# Altium PCB Diag-Board.PcbDoc
Units mm, origin at the board's own origin, x right, y up, seen from the top; angles counter-clockwise.
Board outline 152.4 x 101.6 mm, 2 copper layers (Top Layer, Bottom Layer); 19 components, 130 nets, 420 pads, 0 vias.
Unrouted connection lines stored in the file: 106.
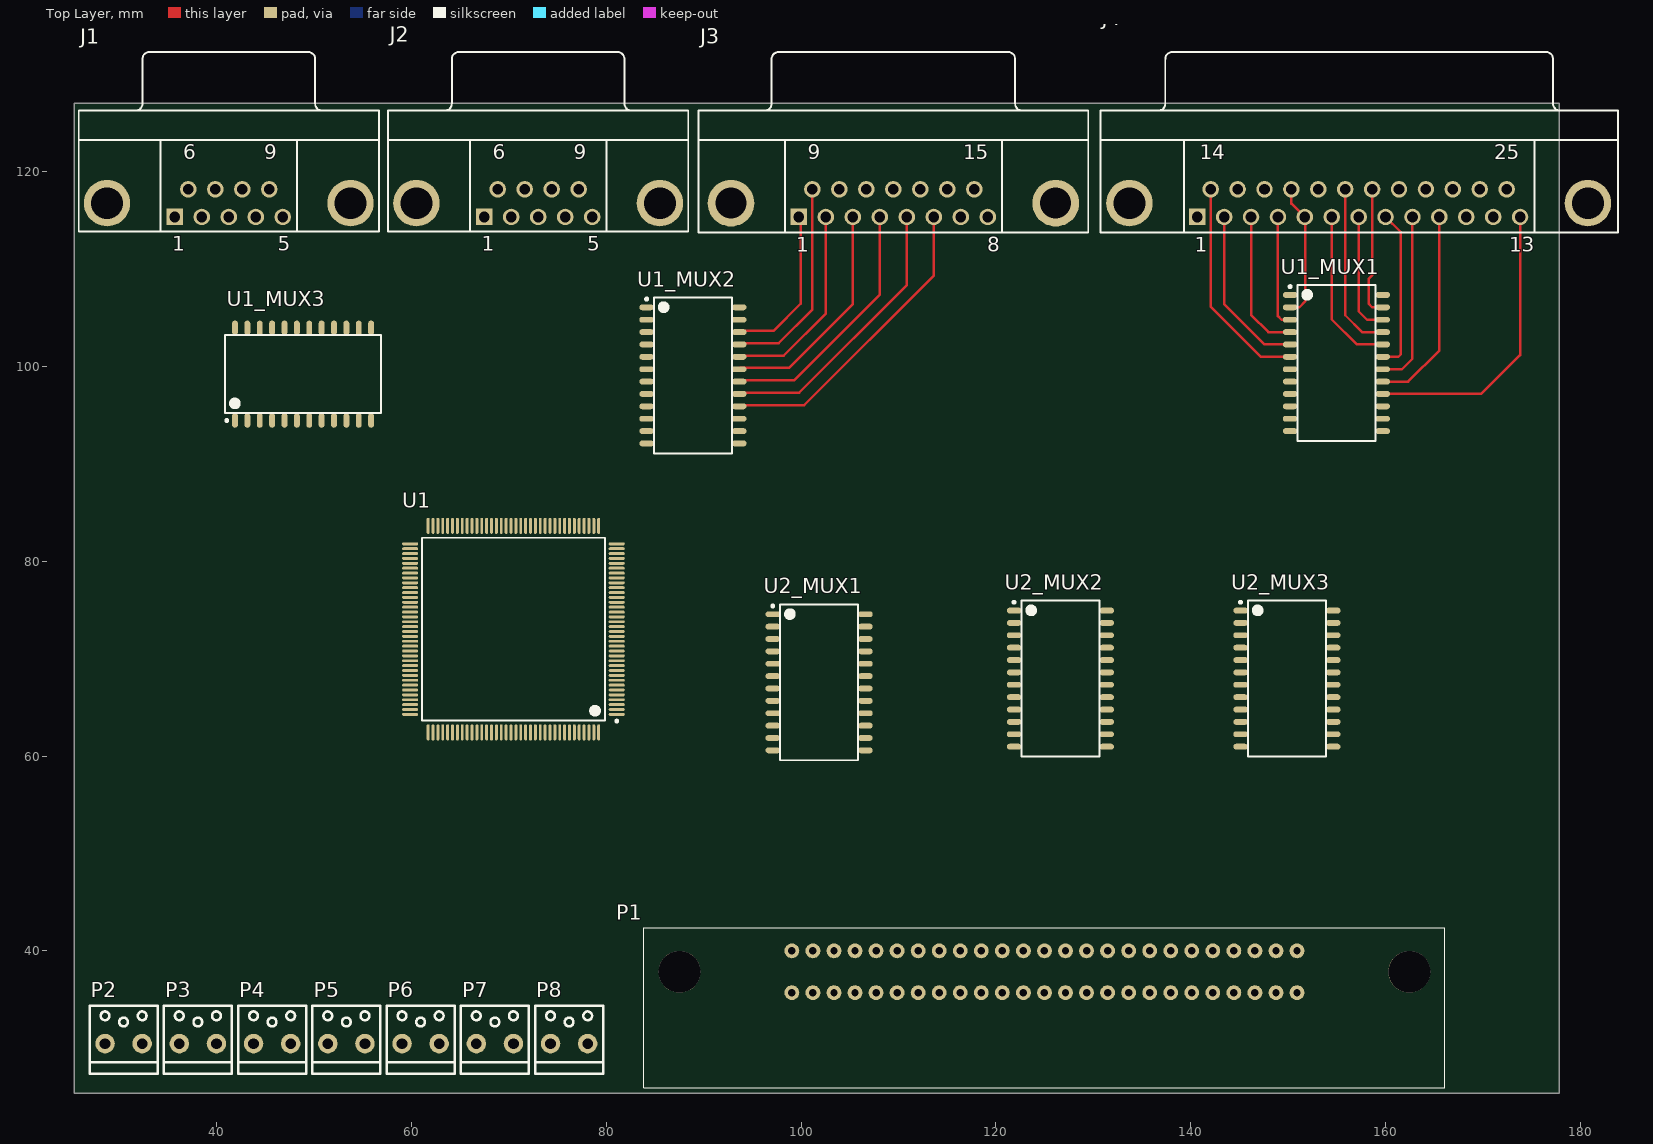
[diagram p0: Top Layer view]
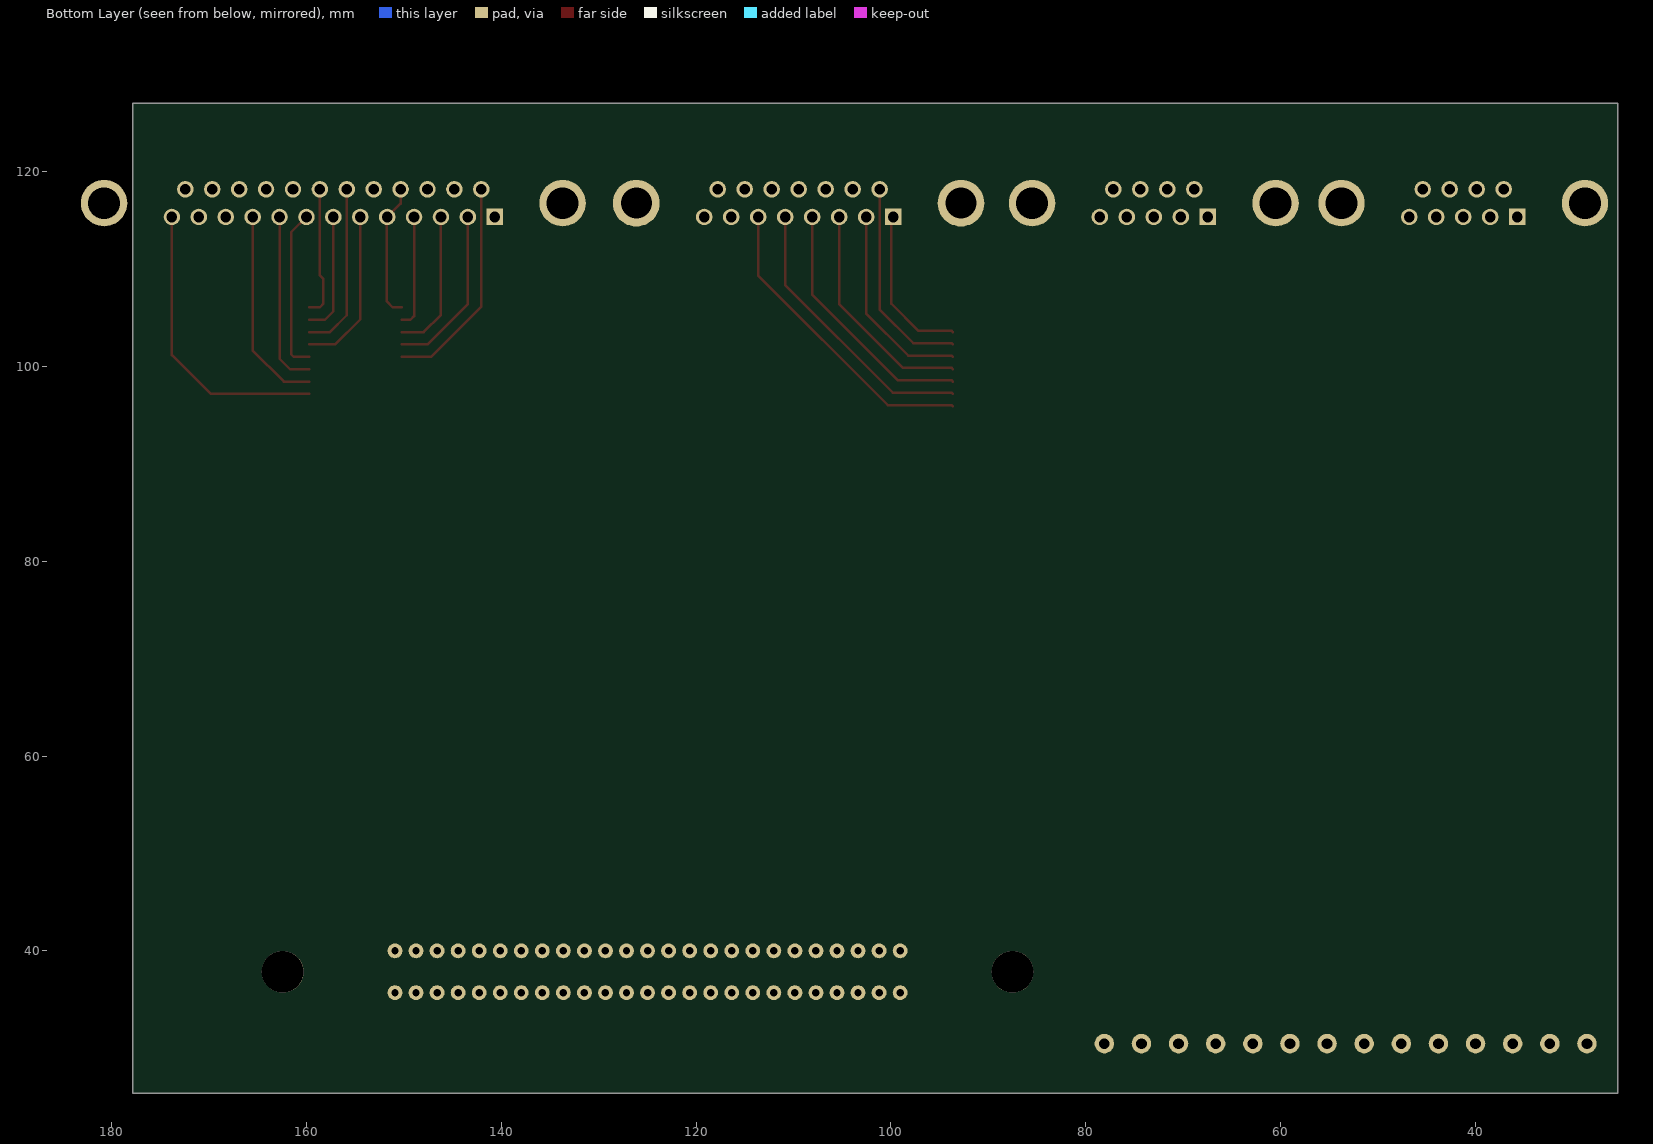
[diagram p1: Bottom Layer view, seen from below]

## Layer stack, top to bottom
Top Solder: solder mask 0.0102, Solder Resist, Dk 3.5
Top Layer: signal copper 0.0356
Dielectric 1: dielectric 0.32, FR-4, Dk 4.8
Bottom Layer: signal copper 0.0356
Bottom Solder: solder mask 0.0102, Solder Resist, Dk 3.5

## Board outline
25.4,25.4 177.8,25.4 177.8,127 25.4,127

## Design rules (kind name [scope] priority, off if disabled: settings)
Clearance [All] p1: gap=0.254
PolygonConnect [All] p1: connectstyle=Relief reliefconductorwidth=0.254 reliefentries=4 polygonreliefangle="90 Angle" airgapwidth=0.254
RoomDefinition MUX3 [InComponentClass('MUX3')] p1: confinementstyle=ConfineIn formatcopy=TRUE lockcomponents=FALSE outline 0,0 50.8,0 50.8,25.4 0,25.4
RoomDefinition MUX2 [InComponentClass('MUX2')] p2: confinementstyle=ConfineIn formatcopy=TRUE lockcomponents=FALSE outline 0,0 50.8,0 50.8,25.4 0,25.4
RoomDefinition MUX1 [InComponentClass('MUX1')] p3: confinementstyle=ConfineIn formatcopy=TRUE lockcomponents=FALSE outline 0,0 50.8,0 50.8,25.4 0,25.4
RoomDefinition MCU [InComponentClass('MCU')] p4: confinementstyle=ConfineIn formatcopy=TRUE lockcomponents=FALSE outline 0,0 50.8,0 50.8,25.4 0,25.4
RoomDefinition Connectors [InComponentClass('Connectors')] p5: confinementstyle=ConfineIn formatcopy=TRUE lockcomponents=FALSE outline 0,0 50.8,0 50.8,25.4 0,25.4
RoutingVias [All] p1: holewidth=0.711 width=1.27 viastyle="Through Hole" minholewidth=0.711 minwidth=1.27 maxholewidth=0.711 maxwidth=1.27
SolderMaskExpansion [All] p1: expansion=0.102
Width [All] p1: maxlimit=0.254 minlimit=0.254 preferedwidth=0.254
30 further rules are at their usual default settings.

## Classes and differential pairs
net class ADDR_MUX[0..23]: ADDR_MUX0 ADDR_MUX1 ADDR_MUX2 ADDR_MUX3 ADDR_MUX4 ADDR_MUX5 ADDR_MUX6 ADDR_MUX7 ADDR_MUX8 ADDR_MUX9 ADDR_MUX10 ADDR_MUX11 ADDR_MUX12 ADDR_MUX13 ADDR_MUX14 ADDR_MUX15 ADDR_MUX16 ADDR_MUX17 ADDR_MUX18 ADDR_MUX19 ADDR_MUX20 ADDR_MUX21 ADDR_MUX22 ADDR_MUX23
channel class MUX_CHANNEL: MUX1 MUX2 MUX3
net class SENS[1..50]: SENS1 SENS2 SENS3 SENS4 SENS5 SENS6 SENS7 SENS8 SENS9 SENS10 SENS11 SENS12 SENS13 SENS14 SENS15 SENS16 SENS17 SENS18 SENS19 SENS20 SENS21 SENS22 SENS23 SENS24 SENS25 SENS26 SENS27 SENS28 SENS29 SENS30 SENS31 SENS32 SENS33 SENS34 SENS35 SENS36 SENS37 SENS38 SENS39 SENS40 SENS41 SENS42 SENS43 SENS44 SENS45 SENS46 SENS47 SENS48 SENS49 SENS50
net class CHECK[1..50]: CHECK1 CHECK2 CHECK3 CHECK4 CHECK5 CHECK6 CHECK7 CHECK8 CHECK9 CHECK10 CHECK11 CHECK12 CHECK13 CHECK14 CHECK15 CHECK16 CHECK17 CHECK18 CHECK19 CHECK20 CHECK21 CHECK22 CHECK23 CHECK24 CHECK25 CHECK26 CHECK27 CHECK28 CHECK29 CHECK30 CHECK31 CHECK32 CHECK33 CHECK34 CHECK35 CHECK36 CHECK37 CHECK38 CHECK39 CHECK40 CHECK41 CHECK42 CHECK43 CHECK44 CHECK45 CHECK46 CHECK47 CHECK48
component class MUX3: U1_MUX3 U2_MUX3
component class MUX2: U1_MUX2 U2_MUX2
component class MUX1: U1_MUX1 U2_MUX1
component class MCU: U1
component class Connectors: J1 J2 J3 J4 P1 P2 P3 P4 P5 P6 P7 P8

## Components (designator, comment, footprint, x,y, rotation, side; value= is the part's Value field where it differs from the comment)
J1 "D Connector 9" DSUB1.385-2H9F 41.275,126.238 r0 top
J2 "D Connector 9" DSUB1.385-2H9M 73.025,126.238 r0 top
J3 "D Connector 15" DSUB1.385-2H15M 109.474,126.238 r0 top
J4 "D Connector 25" DSUB1.385-2H25A-F 157.226,126.238 r0 top
P1 "CENR-50M" CENR-50M 99.06,40.005 r0 top
P2 "DG340-3.81" DG340-3.81-02P-00A(H) 28.575,30.48 r0 top
P3 "DG340-3.81" DG340-3.81-02P-00A(H) 36.195,30.48 r0 top
P4 "DG340-3.81" DG340-3.81-02P-00A(H) 43.815,30.48 r0 top
P5 "DG340-3.81" DG340-3.81-02P-00A(H) 51.435,30.48 r0 top
P6 "DG340-3.81" DG340-3.81-02P-00A(H) 59.055,30.48 r0 top
P7 "DG340-3.81" DG340-3.81-02P-00A(H) 66.675,30.48 r0 top
P8 "DG340-3.81" DG340-3.81-02P-00A(H) 74.295,30.48 r0 top
U1 "STM32F407" LQFP144 70.485,73.025 r180 top
U1_MUX1 "74HC4067; 74HCT4067" SO24 154.94,100.33 r0 top (schematic designator U1)
U1_MUX2 "74HC4067; 74HCT4067" SO24 88.9,99.06 r0 top (schematic designator U1)
U1_MUX3 "74HC4067; 74HCT4067" SO24 48.895,99.187 r90 top (schematic designator U1)
U2_MUX1 "74HC4067; 74HCT4067" SO24 101.854,67.564 r0 top (schematic designator U2)
U2_MUX2 "74HC4067; 74HCT4067" SO24 126.619,67.945 r0 top (schematic designator U2)
U2_MUX3 "74HC4067; 74HCT4067" SO24 149.86,67.945 r0 top (schematic designator U2)

## Footprints (in the part's own frame and the unit in brackets; to place one, negate y for a bottom-side part, rotate by r counter-clockwise, add the part's x,y. Pads: shape width x height; smd on the part's side, far side on the other; paste and mask are expansions set on the pad)
CENR-50M [mil] "Centronic 50pin, PCB mount, right angle"
  round 60 hole 30: 1(0,0) 2(85.04,0) 3(170.08,0) 4(255.12,0) 5(340.16,0) 6(425.2,0) 7(510.24,0) 8(595.28,0) 9(680.31,0) 10(765.35,0) 11(850.39,0) 12(935.43,0) 13(1020.47,0) 14(1105.51,0) 15(1190.55,0) 16(1275.59,0) 17(1360.63,0) 18(1445.67,0) 19(1530.71,0) 20(1615.75,0) 21(1700.79,0) 22(1785.83,0) 23(1870.87,0) 24(1955.91,0) 25(2040.94,0) 26(0,-168.9) 27(85.04,-168.9) 28(170.08,-168.9) 29(255.12,-168.9) 30(340.16,-168.9) 31(425.2,-168.9) 32(510.24,-168.9) 33(595.28,-168.9) 34(680.31,-168.9) 35(765.35,-168.9) 36(850.39,-168.9) 37(935.43,-168.9) 38(1020.47,-168.9) 39(1105.51,-168.9) 40(1190.55,-168.9) 41(1275.59,-168.9) 42(1360.63,-168.9) 43(1445.67,-168.9) 44(1530.71,-168.9) 45(1615.75,-168.9) 46(1700.79,-168.9) 47(1785.83,-168.9) 48(1870.87,-168.9) 49(1955.91,-168.9) 50(2040.94,-168.9)
  round 168.9 hole 168.9 unplated: NC(-453.94,-84.45) NC(2494.88,-84.45)
  silkscreen extent -598,-553 2639,93, body extent -720,-1548 2761,90, height 611
DG340-3.81-02P-00A(H) [mm] "Terminal block"
  round 2 hole 1.1: 1(0,0) 2(3.81,0)
  silkscreen extent -1.59,-3.1 5.4,3.9
DSUB1.385-2H9F [mm] "Connector; D Subminiature; 9 Position; Right Angle; Pitch 1.385 mm"
  rect 1.69x1.69 hole 1.09: 1(-5.54,-10.92)
  round 1.69 hole 1.09: 2(-2.77,-10.92) 3(0,-10.92) 4(2.77,-10.92) 5(5.54,-10.92) 6(-4.155,-8.08) 7(-1.385,-8.08) 8(1.385,-8.08) 9(4.155,-8.08)
  round 4.76 hole 3.26: 10(-12.495,-9.5) 11(12.495,-9.5)
  silkscreen extent -15.4,-12.4 15.4,6, body extent -15.41,-12.5 15.4,5.8, height 12.56
DSUB1.385-2H9M [mm] "Connector; D Subminiature; 9 Position; Right Angle; Pitch 1.385 mm"
  rect 1.69x1.69 hole 1.09: 1(-5.54,-10.92)
  round 1.69 hole 1.09: 2(-2.77,-10.92) 3(0,-10.92) 4(2.77,-10.92) 5(5.54,-10.92) 6(-4.155,-8.08) 7(-1.385,-8.08) 8(1.385,-8.08) 9(4.155,-8.08)
  round 4.76 hole 3.26: 10(-12.495,-9.5) 11(12.495,-9.5)
  silkscreen extent -15.4,-12.4 15.4,6, body extent -15.36,-12.87 15.36,6.3, height 12.56
DSUB1.385-2H15M [mm] "Connector; D Subminiature; 15 Position; Right Angle; Pitch 1.385 mm"
  rect 1.69x1.69 hole 1.09: 1(-9.695,-10.92)
  round 1.69 hole 1.09: 2(-6.925,-10.92) 3(-4.155,-10.92) 4(-1.385,-10.92) 5(1.385,-10.92) 6(4.155,-10.92) 7(6.925,-10.92) 8(9.695,-10.92) 9(-8.31,-8.08) 10(-5.54,-8.08) 11(-2.77,-8.08) 12(0,-8.08) 13(2.77,-8.08) 14(5.54,-8.08) 15(8.31,-8.08)
  round 4.8 hole 3.18: 16(-16.66,-9.5) 17(16.66,-9.5)
  silkscreen extent -20,-12.5 20,6, body extent -19.52,-13.17 19.52,6, height 12.55
DSUB1.385-2H25A-F [mm] "Connector; D Subminiature; 25 Position; Right Angle; Pitch 1.385 mm"
  rect 1.69x1.69 hole 1.09: 1(-16.566,-10.92)
  round 1.69 hole 1.09: 2(-13.805,-10.92) 3(-11.044,-10.92) 4(-8.283,-10.92) 5(-5.522,-10.92) 6(-2.761,-10.92) 7(0,-10.92) 8(2.761,-10.92) 9(5.522,-10.92) 10(8.283,-10.92) 11(11.044,-10.92) 12(13.805,-10.92) 13(16.566,-10.92) 14(-15.185,-8.08) 15(-12.424,-8.08) 16(-9.663,-8.08) 17(-6.902,-8.08) 18(-4.141,-8.08) 19(-1.38,-8.08) 20(1.381,-8.08) 21(4.142,-8.08) 22(6.903,-8.08) 23(9.664,-8.08) 24(12.425,-8.08) 25(15.186,-8.08)
  round 4.76 hole 3.26: 26(-23.526,-9.5) 27(23.526,-9.5)
  silkscreen extent -26.5,-12.5 26.6,6, body extent -26.5,-12.5 26.54,8, height 12.56
LQFP144 [mm] "TSQFP, 144-Leads, Body 20.00x20.00mm, Pitch 0.50mm, IPC Medium Density"
  oval 1.65x0.3 smd: 1(-10.6,8.75) 2(-10.6,8.25) 3(-10.6,7.75) 4(-10.6,7.25) 5(-10.6,6.75) 6(-10.6,6.25) 7(-10.6,5.75) 8(-10.6,5.25) 9(-10.6,4.75) 10(-10.6,4.25) 11(-10.6,3.75) 12(-10.6,3.25) 13(-10.6,2.75) 14(-10.6,2.25) 15(-10.6,1.75) 16(-10.6,1.25) 17(-10.6,0.75) 18(-10.6,0.25) 19(-10.6,-0.25) 20(-10.6,-0.75) 21(-10.6,-1.25) 22(-10.6,-1.75) 23(-10.6,-2.25) 24(-10.6,-2.75) 25(-10.6,-3.25) 26(-10.6,-3.75) 27(-10.6,-4.25) 28(-10.6,-4.75) 29(-10.6,-5.25) 30(-10.6,-5.75) 31(-10.6,-6.25) 32(-10.6,-6.75) 33(-10.6,-7.25) 34(-10.6,-7.75) 35(-10.6,-8.25) 36(-10.6,-8.75) 73(10.6,-8.75) 74(10.6,-8.25) 75(10.6,-7.75) 76(10.6,-7.25) 77(10.6,-6.75) 78(10.6,-6.25) 79(10.6,-5.75) 80(10.6,-5.25) 81(10.6,-4.75) 82(10.6,-4.25) 83(10.6,-3.75) 84(10.6,-3.25) 85(10.6,-2.75) 86(10.6,-2.25) 87(10.6,-1.75) 88(10.6,-1.25) 89(10.6,-0.75) 90(10.6,-0.25) 91(10.6,0.25) 92(10.6,0.75) 93(10.6,1.25) 94(10.6,1.75) 95(10.6,2.25) 96(10.6,2.75) 97(10.6,3.25) 98(10.6,3.75) 99(10.6,4.25) 100(10.6,4.75) 101(10.6,5.25) 102(10.6,5.75) 103(10.6,6.25) 104(10.6,6.75) 105(10.6,7.25) 106(10.6,7.75) 107(10.6,8.25) 108(10.6,8.75)
  oval 0.3x1.65 smd: 37(-8.75,-10.6) 38(-8.25,-10.6) 39(-7.75,-10.6) 40(-7.25,-10.6) 41(-6.75,-10.6) 42(-6.25,-10.6) 43(-5.75,-10.6) 44(-5.25,-10.6) 45(-4.75,-10.6) 46(-4.25,-10.6) 47(-3.75,-10.6) 48(-3.25,-10.6) 49(-2.75,-10.6) 50(-2.25,-10.6) 51(-1.75,-10.6) 52(-1.25,-10.6) 53(-0.75,-10.6) 54(-0.25,-10.6) 55(0.25,-10.6) 56(0.75,-10.6) 57(1.25,-10.6) 58(1.75,-10.6) 59(2.25,-10.6) 60(2.75,-10.6) 61(3.25,-10.6) 62(3.75,-10.6) 63(4.25,-10.6) 64(4.75,-10.6) 65(5.25,-10.6) 66(5.75,-10.6) 67(6.25,-10.6) 68(6.75,-10.6) 69(7.25,-10.6) 70(7.75,-10.6) 71(8.25,-10.6) 72(8.75,-10.6) 109(8.75,10.6) 110(8.25,10.6) 111(7.75,10.6) 112(7.25,10.6) 113(6.75,10.6) 114(6.25,10.6) 115(5.75,10.6) 116(5.25,10.6) 117(4.75,10.6) 118(4.25,10.6) 119(3.75,10.6) 120(3.25,10.6) 121(2.75,10.6) 122(2.25,10.6) 123(1.75,10.6) 124(1.25,10.6) 125(0.75,10.6) 126(0.25,10.6) 127(-0.25,10.6) 128(-0.75,10.6) 129(-1.25,10.6) 130(-1.75,10.6) 131(-2.25,10.6) 132(-2.75,10.6) 133(-3.25,10.6) 134(-3.75,10.6) 135(-4.25,10.6) 136(-4.75,10.6) 137(-5.25,10.6) 138(-5.75,10.6) 139(-6.25,10.6) 140(-6.75,10.6) 141(-7.25,10.6) 142(-7.75,10.6) 143(-8.25,10.6) 144(-8.75,10.6)
  silkscreen extent -10.73,-9.38 9.38,9.57, body extent -11.07,-11.07 11.08,11.08, height 1.6
SO24 [mm] "SOT137-1, 24-Leads, Body 15,40x7,50mm, Pitch 1,27mm, IPC Medium Density"
  oval 1.5x0.6 smd: 1(-4.75,6.985) 2(-4.75,5.715) 3(-4.75,4.445) 4(-4.75,3.175) 5(-4.75,1.905) 6(-4.75,0.635) 7(-4.75,-0.635) 8(-4.75,-1.905) 9(-4.75,-3.175) 10(-4.75,-4.445) 11(-4.75,-5.715) 12(-4.75,-6.985) 13(4.75,-6.985) 14(4.75,-5.715) 15(4.75,-4.445) 16(4.75,-3.175) 17(4.75,-1.905) 18(4.75,-0.635) 19(4.75,0.635) 20(4.75,1.905) 21(4.75,3.175) 22(4.75,4.445) 23(4.75,5.715) 24(4.75,6.985)
  silkscreen extent -4.87,-8 4,8, body extent -5.16,-7.8 5.16,7.8, height 2.65

## Part data
J1 J2: "Receptacle Assembly, 9 Position, Right Angle"
J3: "Receptacle Assembly, 15 Position, Right Angle"
J4: "Receptacle Assembly, 25 Position, Right Angle"
P2 P3 P4 P5 P6 P7 P8: library part DG340-3.81-02P, "Terminal block"
U1: library part STM32F407ZGT6, "ST Microcontroller ARM 32-bit Cortex M4"
U1_MUX1 U1_MUX2 U1_MUX3 U2_MUX1 U2_MUX2 U2_MUX3: "16-channel analog multiplexer/demultiplexer"

## Nets (pads, with @x,y where several pads share a name; then routed paths per layer and width w, separated by ;. In a path a pad name is that pad's centre, name@x,y a point inside that pad or via, vN(x,y) a via of type N, cw(c..) or ccw(c..) an arc to the next point about the centre after c; other vN are vias at no path point)
ADDR_MUX0: U1.10 U1_MUX1.10
ADDR_MUX1: U1.11 U1_MUX1.11
ADDR_MUX2: U1.12 U1_MUX1.14
ADDR_MUX3: U1.13 U1_MUX1.13
ADDR_MUX4: U1.14 U2_MUX1.10
ADDR_MUX5: U1.15 U2_MUX1.11
ADDR_MUX6: U1.50 U2_MUX1.14
ADDR_MUX7: U1.53 U2_MUX1.13
ADDR_MUX8: U1.54 U1_MUX2.10
ADDR_MUX9: U1.55 U1_MUX2.11
ADDR_MUX10: U1.56 U1_MUX2.14
ADDR_MUX11: U1.57 U1_MUX2.13
ADDR_MUX12: U1.87 U2_MUX2.10
ADDR_MUX13: U1.88 U2_MUX2.11
ADDR_MUX14: U1.89 U2_MUX2.14
ADDR_MUX15: U1.90 U2_MUX2.13
ADDR_MUX16: U1.80 U1_MUX3.10
ADDR_MUX17: U1.81 U1_MUX3.11
ADDR_MUX18: U1.82 U1_MUX3.14
ADDR_MUX19: U1.2 U1_MUX3.13
ADDR_MUX20: U1.3 U2_MUX3.10
ADDR_MUX21: U1.4 U2_MUX3.11
ADDR_MUX22: U1.5 U2_MUX3.14
ADDR_MUX23: U1.1 U2_MUX3.13
CHECK1: J3.8 U1_MUX1.9
CHECK2: J3.15 U1_MUX1.8
CHECK3: J3.7 U1_MUX1.7
CHECK4: J4.14 U1_MUX1.6 | length 22.3
  Top Layer w0.254: J4.14 142.041,106.117 147.193,100.965 U1_MUX1.6
CHECK5: J4.2 U1_MUX1.5 | length 17.4
  Top Layer w0.254: J4.2 143.421,106.388 147.574,102.235 U1_MUX1.5
CHECK6: J4.3 U1_MUX1.4 | length 14.8
  Top Layer w0.254: J4.3 146.182,105.278 147.955,103.505 U1_MUX1.4
CHECK7: J4.4 U1_MUX1.3 | length 11.6
  Top Layer w0.254: J4.4 148.943,105.145 149.313,104.775 U1_MUX1.3
CHECK8: J4.5 J4.17 U1_MUX1.2 | length 13.9
  Top Layer w0.254: U1_MUX1.2 151.13,106.045 151.765,106.68 151.765,115.257 J4.5 150.324,116.698 J4.17
CHECK9: J4.20 U1_MUX1.23 | length 13.5
  Top Layer w0.254: J4.20 158.607,109.331 158.242,108.966 158.242,106.426 158.623,106.045 U1_MUX1.23
CHECK10: J4.7 U1_MUX1.22 | length 12.5
  Top Layer w0.254: J4.7 157.226,105.646 158.097,104.775 U1_MUX1.22
CHECK11: J4.19 U1_MUX1.21 | length 17.5
  Top Layer w0.254: J4.19 155.846,105.23 157.571,103.505 U1_MUX1.21
CHECK12: J4.6 U1_MUX1.20 | length 16.8
  Top Layer w0.254: J4.6 154.465,104.815 157.045,102.235 U1_MUX1.20
CHECK13: J4.8 U1_MUX1.19 | length 16.7
  Top Layer w0.254: U1_MUX1.19 161.29,100.965 161.544,101.219 161.544,113.761 J4.8
CHECK14: J4.9 U1_MUX1.18 | length 18.1
  Top Layer w0.254: U1_MUX1.18 161.671,99.695 162.748,100.772 J4.9
CHECK15: J4.10 U1_MUX1.17 | length 20.8
  Top Layer w0.254: U1_MUX1.17 162.306,98.425 165.509,101.628 J4.10
CHECK16: J4.13 U1_MUX1.16 | length 29.9
  Top Layer w0.254: U1_MUX1.16 169.799,97.155 173.792,101.148 J4.13
CHECK17: J2.1 U1_MUX2.9
CHECK18: J2.6 U1_MUX2.8
CHECK19: J2.2 U1_MUX2.7
CHECK20: J2.7 U1_MUX2.6
CHECK21: J2.3 U1_MUX2.5
CHECK22: J2.8 U1_MUX2.4
CHECK23: J2.4 U1_MUX2.3
CHECK24: U1_MUX2.2
CHECK25: U1_MUX2.23
CHECK26: J3.1 U1_MUX2.22 | length 16.5
  Top Layer w0.254: U1_MUX2.22 93.777,103.632 97.173,103.632 99.958,106.417 99.958,115.139 J3.1
CHECK27: J3.9 U1_MUX2.21 | length 21.3
  Top Layer w0.254: U1_MUX2.21 93.777,102.362 97.699,102.362 101.164,105.827 J3.9
CHECK28: J3.2 U1_MUX2.20 | length 20.6
  Top Layer w0.254: U1_MUX2.20 93.777,101.092 98.225,101.092 102.549,105.416 J3.2
CHECK29: J3.3 U1_MUX2.19 | length 23.4
  Top Layer w0.254: U1_MUX2.19 93.777,99.822 98.751,99.822 105.319,106.39 J3.3
CHECK30: J3.4 U1_MUX2.18 | length 26.1
  Top Layer w0.254: U1_MUX2.18 93.777,98.552 99.277,98.552 108.089,107.364 J3.4
CHECK31: J3.5 U1_MUX2.17 | length 28.8
  Top Layer w0.254: U1_MUX2.17 93.777,97.282 99.803,97.282 110.859,108.338 J3.5
CHECK32: J3.6 U1_MUX2.16 | length 31.5
  Top Layer w0.254: U1_MUX2.16 93.777,96.012 100.329,96.012 113.629,109.312 J3.6
CHECK33: U1_MUX3.9
CHECK34: U1_MUX3.8
CHECK35: U1_MUX3.7
CHECK36: U1_MUX3.6
CHECK37: U1_MUX3.5
CHECK38: U1_MUX3.4
CHECK39: U1_MUX3.3
CHECK40: U1_MUX3.2
CHECK41: U1_MUX3.23
CHECK42: U1_MUX3.22
CHECK43: U1_MUX3.21
CHECK44: U1_MUX3.20
CHECK45: U1_MUX3.19
CHECK46: U1_MUX3.18
CHECK47: U1_MUX3.17
CHECK48: U1_MUX3.16
GND: J1.10 J1.11 J2.10 J2.11 J3.16 J3.17 J4.26 J4.27 U1_MUX1.12 U1_MUX1.15 U1_MUX2.12 U1_MUX2.15 U1_MUX3.12 U1_MUX3.15 U2_MUX1.12 U2_MUX1.15 U2_MUX2.12 U2_MUX2.15 U2_MUX3.12 U2_MUX3.15
NetU1_MUX1_1: U1_MUX1.1
NetU1_MUX2_1: U1_MUX2.1
NetU1_MUX3_1: U1_MUX3.1
NetU2_MUX1_1: U2_MUX1.1
NetU2_MUX2_1: U2_MUX2.1
NetU2_MUX3_1: U2_MUX3.1
SENS1: P1.1 U2_MUX1.9
SENS2: P1.2 U2_MUX1.8
SENS3: P1.3 U2_MUX1.7
SENS4: P1.4 U2_MUX1.6
SENS5: P1.5 U2_MUX1.5
SENS6: P1.6 U2_MUX1.4
SENS7: P1.7 U2_MUX1.3
SENS8: P1.8 U2_MUX1.2
SENS9: P1.9 U2_MUX1.23
SENS10: P1.10 U2_MUX1.22
SENS11: P1.11 U2_MUX1.21
SENS12: P1.12 U2_MUX1.20
SENS13: P1.13 U2_MUX1.19
SENS14: P1.14 U2_MUX1.18
SENS15: P1.15 U2_MUX1.17
SENS16: P1.16 U2_MUX1.16
SENS17: P1.17 U2_MUX2.9
SENS18: P1.18 U2_MUX2.8
SENS19: P1.19 U2_MUX2.7
SENS20: P1.20 U2_MUX2.6
SENS21: P1.21 U2_MUX2.5
SENS22: P1.22 U2_MUX2.4
SENS23: P1.23 U2_MUX2.3
SENS24: P1.24 U2_MUX2.2
SENS25: P1.25 U2_MUX2.23
SENS26: P1.26 U2_MUX2.22
SENS27: P1.27 U2_MUX2.21
SENS28: P1.28 U2_MUX2.20
SENS29: P1.29 U2_MUX2.19
SENS30: P1.30 U2_MUX2.18
SENS31: P1.31 U2_MUX2.17
SENS32: P1.32 U2_MUX2.16
SENS33: P1.33 U2_MUX3.9
SENS34: P1.34 U2_MUX3.8
SENS35: P1.35 U2_MUX3.7
SENS36: P1.36 U2_MUX3.6
SENS37: P1.37 U2_MUX3.5
SENS38: P1.38 U2_MUX3.4
SENS39: P1.39 U2_MUX3.3
SENS40: P1.40 U2_MUX3.2
SENS41: P1.41 U2_MUX3.23
SENS42: P1.42 U2_MUX3.22
SENS43: P1.43 U2_MUX3.21
SENS44: P1.44 U2_MUX3.20
SENS45: P1.45 U2_MUX3.19
SENS46: P1.46 U2_MUX3.18
SENS47: P1.47 U2_MUX3.17
SENS48: P1.48 U2_MUX3.16
SENS49: P1.49
SENS50: P1.50
VCC: U1_MUX1.24 U1_MUX2.24 U1_MUX3.24 U2_MUX1.24 U2_MUX2.24 U2_MUX3.24
pads on no net: J1.1 J1.2 J1.3 J1.4 J1.5 J1.6 J1.7 J1.8 J1.9 J2.5 J2.9 J3.10 J3.11 J3.12 J3.13 J3.14 J4.1 J4.11 J4.12 J4.15 J4.16 J4.18 J4.21 J4.22 J4.23 J4.24 J4.25 P1.NC P2.1 P2.2 P3.1 P3.2 P4.1 P4.2 P5.1 P5.2 P6.1 P6.2 P7.1 P7.2 P8.1 P8.2 U1.6 U1.7 U1.8 U1.9 U1.16 U1.17 U1.18 U1.19 U1.20 U1.21 U1.22 U1.23 U1.24 U1.25 U1.26 U1.27 U1.28 U1.29 U1.30 U1.31 U1.32 U1.33 U1.34 U1.35 U1.36 U1.37 U1.38 U1.39 U1.40 U1.41 U1.42 U1.43 U1.44 U1.45 U1.46 U1.47 U1.48 U1.49 U1.51 U1.52 U1.58 U1.59 U1.60 U1.61 U1.62 U1.63 U1.64 U1.65 U1.66 U1.67 U1.68 U1.69 U1.70 U1.71 U1.72 U1.73 U1.74 U1.75 U1.76 U1.77 U1.78 U1.79 U1.83 U1.84 U1.85 U1.86 U1.91 U1.92 U1.93 U1.94 U1.95 U1.96 U1.97 U1.98 U1.99 U1.100 U1.101 U1.102 U1.103 U1.104 U1.105 U1.106 U1.107 U1.108 U1.109 U1.110 U1.111 U1.112 U1.113 U1.114 U1.115 U1.116 U1.117 U1.118 U1.119 U1.120 U1.121 U1.122 U1.123 U1.124 U1.125 U1.126 U1.127 U1.128 U1.129 U1.130 U1.131 U1.132 U1.133 U1.134 U1.135 U1.136 U1.137 U1.138 U1.139 U1.140 U1.141 U1.142 U1.143 U1.144

## Text inside footprints (layer, text, board x,y; h text height)
J1: Top Overlay "1" at 35.485,111.863 h1.5; Top Overlay "5" at 46.315,111.863 h1.5; Top Overlay "9" at 44.93,121.263 h1.5; Top Overlay "6" at 36.62,121.263 h1.5
J2: Top Overlay "1" at 67.235,111.863 h1.5; Top Overlay "5" at 78.065,111.863 h1.5; Top Overlay "9" at 76.68,121.263 h1.5; Top Overlay "6" at 68.37,121.263 h1.5
J3: Top Overlay "1" at 99.529,111.763 h1.5; Top Overlay "8" at 119.126,111.763 h1.5; Top Overlay "15" at 116.659,121.263 h1.5; Top Overlay "9" at 100.664,121.263 h1.5
J4: Top Overlay "1" at 140.41,111.763 h1.5; Top Overlay "13" at 172.667,111.763 h1.5; Top Overlay "14" at 140.916,121.263 h1.5; Top Overlay "25" at 171.162,121.263 h1.5